# EAGLE board Schemat termometru sWERSJA KOLEJNAAAAA DOSKONALA 3 (EAGLE 9.4.1)
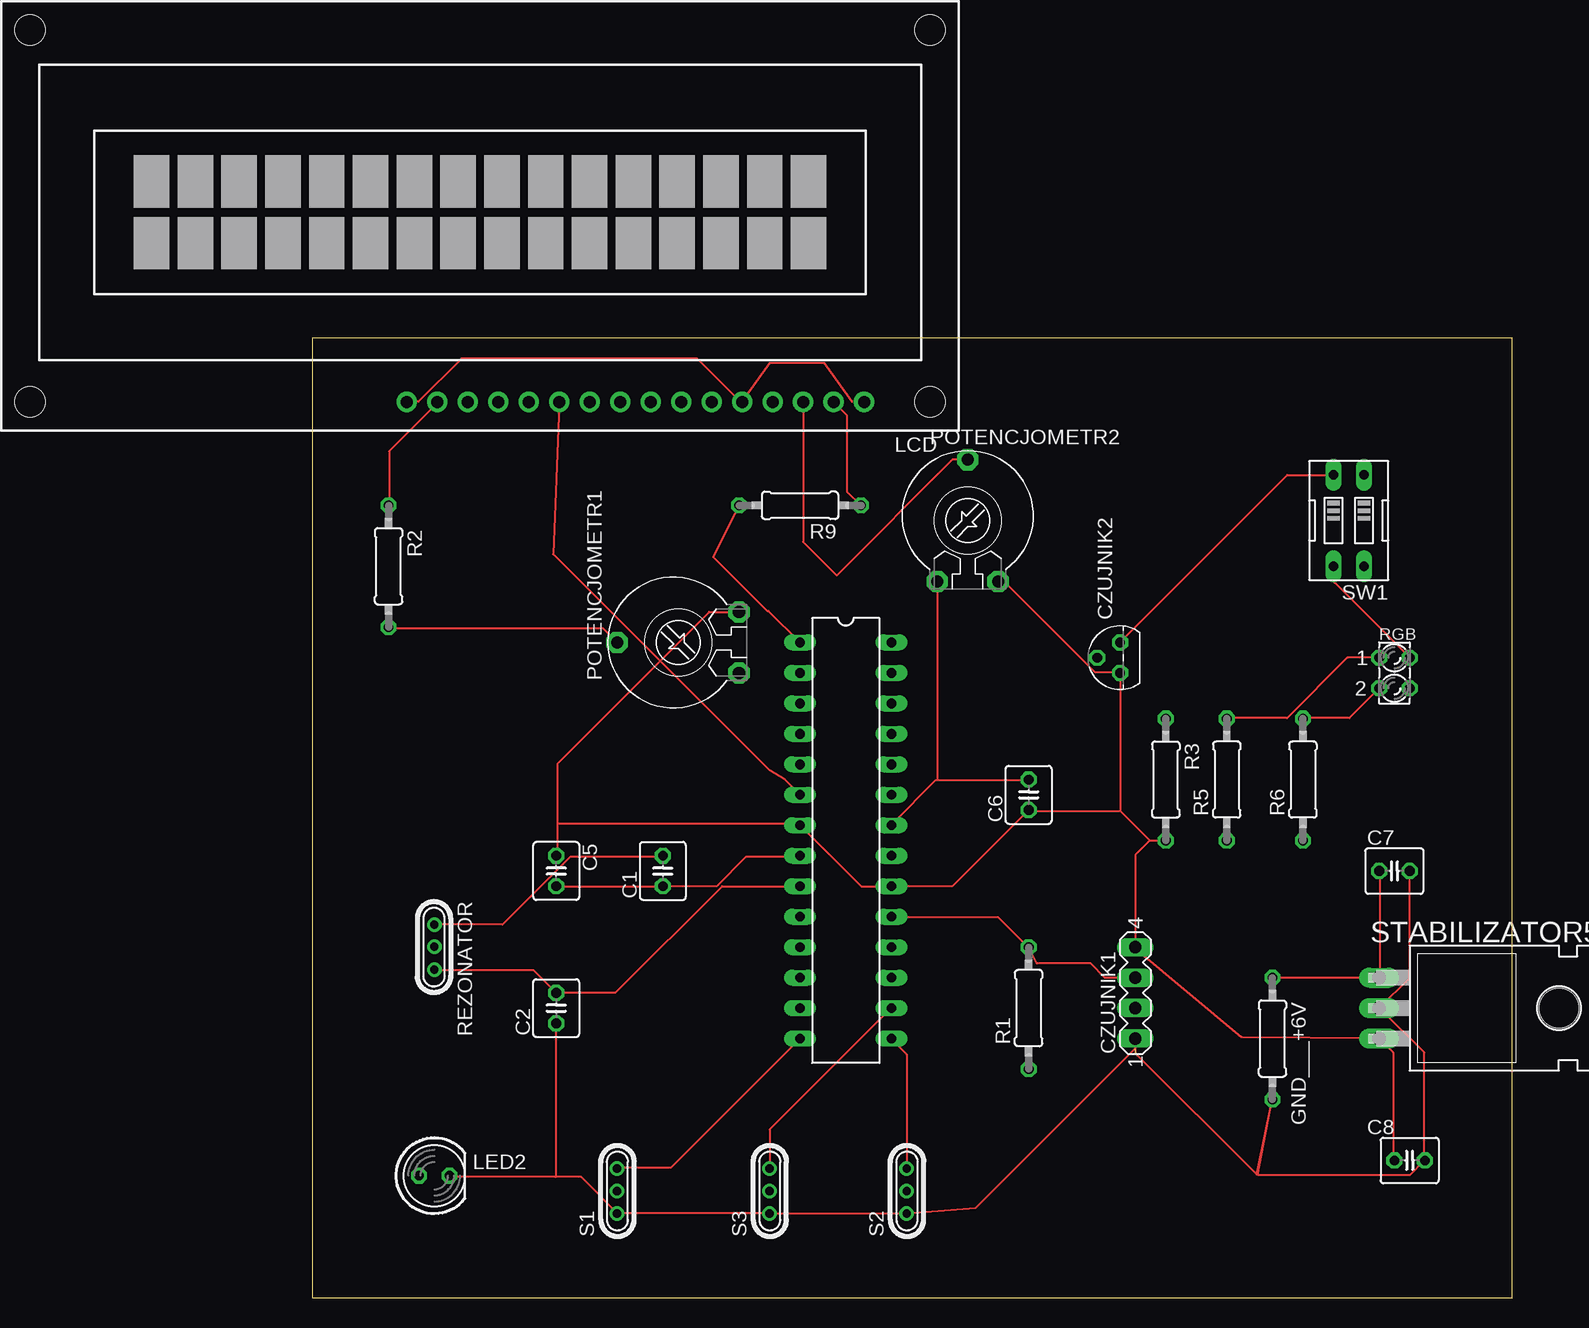
[diagram p0: board, top side]
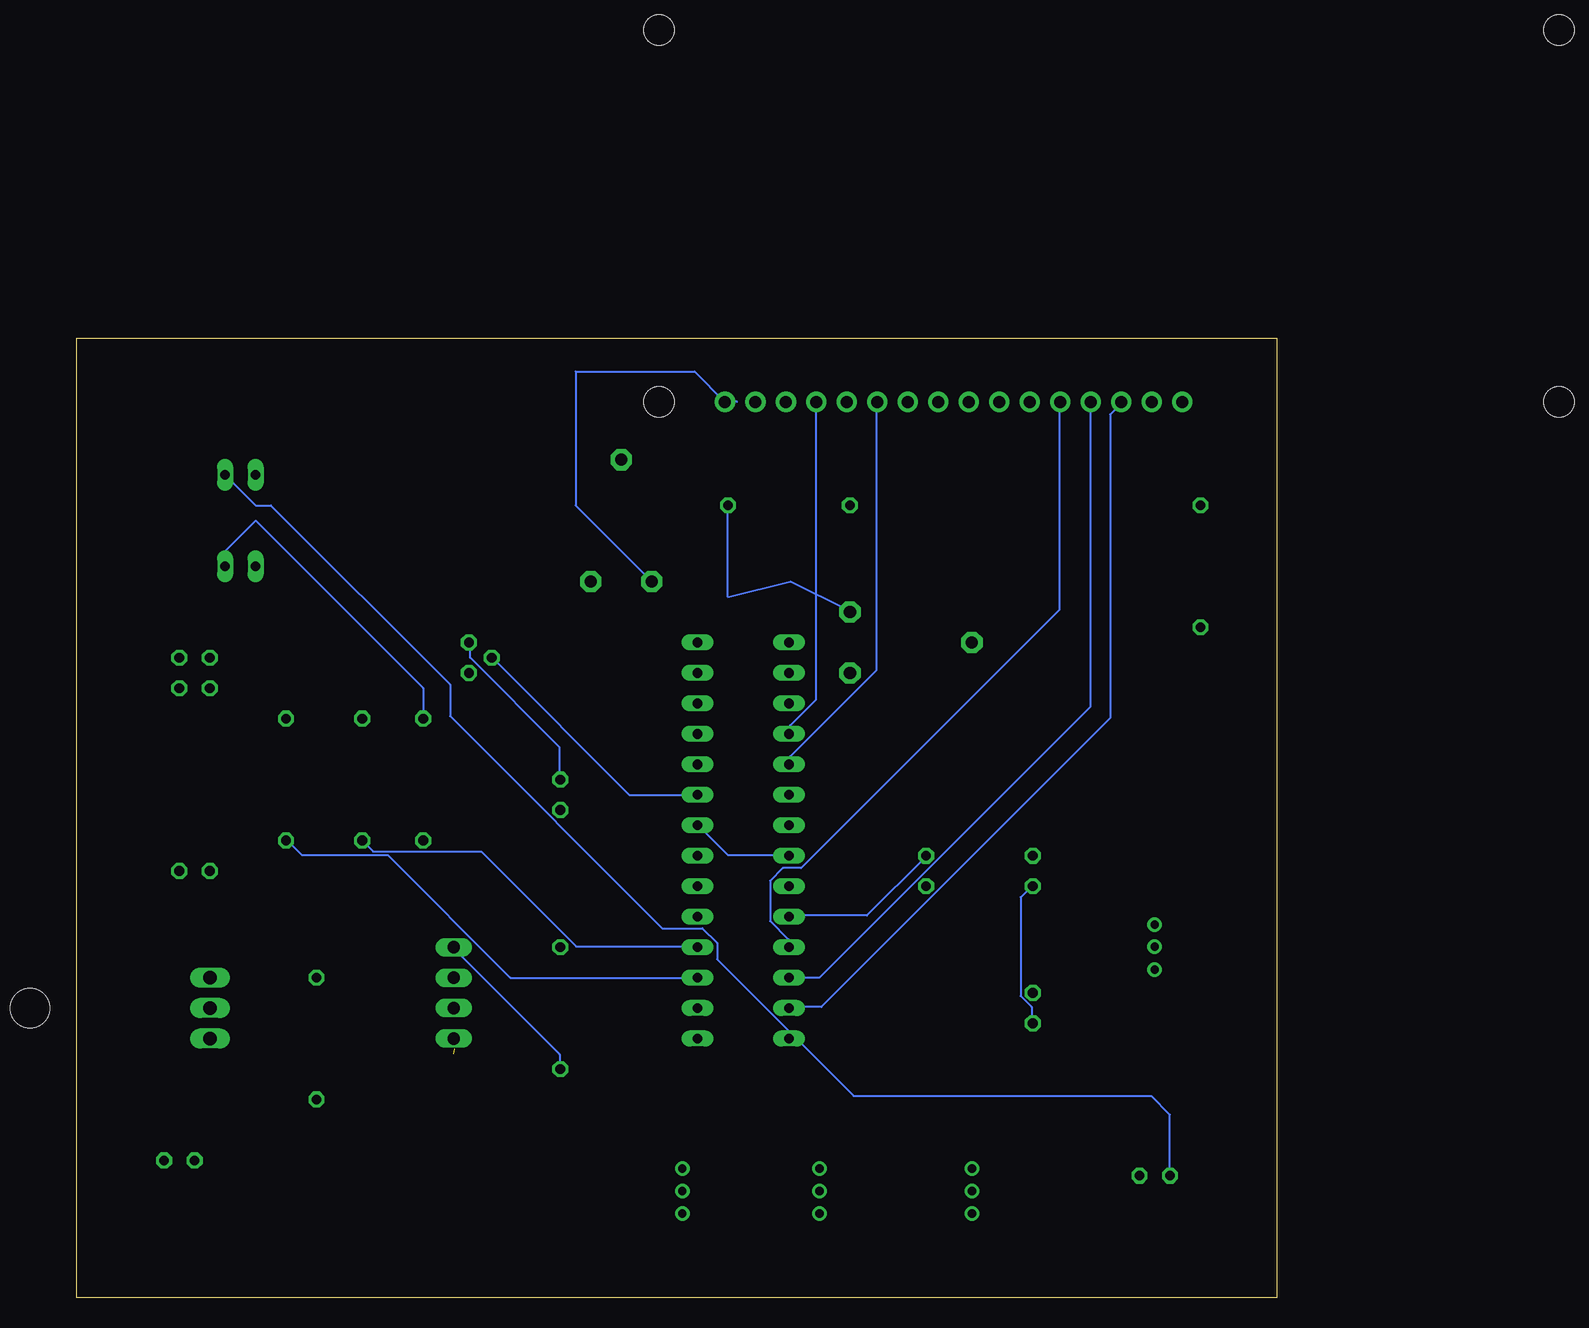
[diagram p1: board, bottom side, seen from below]

Size 100 x 80 mm. Coordinates in mm from the lower left corner, seen from the top.
Outline: 0,0 100,0 100,80 0,80 0,0
Copper layers (1*16): Top 0.035mm / dielectric 1.5mm / Bottom 0.035mm
Design rules "default": minimum track width 6mil, minimum drill 0.35mm, track to track 6mil, track to pad 6mil, pad to pad 6mil, via to via 6mil, smd to smd 6mil, copper to edge 40mil, drill to drill 6mil, minimum pad ring 10mil, minimum via ring 8mil, stop-mask expansion 4mil, vias tented up to drill 0mil, thermal gap 10mil

## Footprints (pad centres in the part's own frame; a part is rotated, then mirrored left to right if it is on the bottom)
C025-040X050 = drill 0.813 octagon: 1 -1.27,0; 2 1.27,0
MA04-1 = drill 1.016 long: 1 -3.81,0; 2 -1.27,0; 3 1.27,0; 4 3.81,0
TO92 = drill 0.813 octagon: 1 1.27,0; 2 0,1.905; 3 -1.27,0
0207/10 = drill 0.813 octagon: 1 -5.08,0; 2 5.08,0
DIL28-3 = drill 0.813 long: 1 -16.51,-3.81; 2 -13.97,-3.81; 3 -11.43,-3.81; 4 -8.89,-3.81; 5 -6.35,-3.81; 6 -3.81,-3.81; 7 -1.27,-3.81; 8 1.27,-3.81; 9 3.81,-3.81; 10 6.35,-3.81; 11 8.89,-3.81; 12 11.43,-3.81; 13 13.97,-3.81; 14 16.51,-3.81; 15 16.51,3.81; 16 13.97,3.81; 17 11.43,3.81; 18 8.89,3.81; 19 6.35,3.81; 20 3.81,3.81; 21 1.27,3.81; 22 -1.27,3.81; 23 -3.81,3.81; 24 -6.35,3.81; 25 -8.89,3.81; 26 -11.43,3.81; 27 -13.97,3.81; 28 -16.51,3.81
TUXGR_16X2_R2 = drill 1 pad 1.676: 1 -32,15.5; 2 -29.46,15.5; 3 -26.92,15.5; 4 -24.38,15.5; 5 -21.84,15.5; 6 -19.3,15.5; 7 -16.76,15.5; 8 -14.22,15.5; 9 -11.68,15.5; 10 -9.14,15.5; 11 -6.6,15.5; 12 -4.06,15.5; 13 -1.52,15.5; 14 1.02,15.5; 15 3.56,15.5; 16 6.1,15.5 | hole 2.5: -37.5,-15.5; 37.5,-15.5; -37.5,15.5; 37.5,15.5
LED5MM = drill 0.813 octagon: A -1.27,0; K 1.27,0
PT-10 = drill 1.016 pad 1.778 octagon: 1 -2.54,-5.08; 2 2.54,-5.08; 3 0,5.08
UM1 = drill 0.7 pad 1.2: 1 -1.875,0; 2 -0.027,0; 3 1.875,0
LZR182 = drill 0.813 octagon: A1 -1.27,1.27; A2 -1.27,-1.27; K1 1.27,1.27; K2 1.27,-1.27
TO220H = drill 1.118 long: 1 -2.54,-10.16; 2 0,-10.16; 3 2.54,-10.16 | hole 3.302: 0,4.826
EDG-02 = drill 0.813 long: 1 -1.27,-3.81; 2 1.27,-3.81; 3 1.27,3.81; 4 -1.27,3.81

## Placement (x,y rotation side)
C1  [C025-040X050]  29.21,35.56 90 top
C2  [C025-040X050]  20.32,24.13 90 top
C5  [C025-040X050]  20.32,35.56 270 top
C6  [C025-040X050]  59.69,41.91 90 top
C7  [C025-040X050]  90.17,35.56 0 top
C8  [C025-040X050]  91.44,11.43 0 top
CZUJNIK1  [MA04-1]  68.58,25.4 90 top
CZUJNIK2  BC238  [TO92]  67.31,53.34 90 top
GND___+6V  [0207/10]  80.01,21.59 270 top
IC1  MEGA8-P  [DIL28-3]  44.45,38.1 270 top
LCD  TUXGR_16X2_R2  [TUXGR_16X2_R2]  13.97,90.17 180 top
LED2  [LED5MM]  10.16,10.16 0 top
POTENCJOMETR1  [PT-10]  30.48,54.61 90 top
POTENCJOMETR2  [PT-10]  54.61,64.77 0 top
R1  [0207/10]  59.69,24.13 90 top
R2  [0207/10]  6.35,60.96 270 top
R3  [0207/10]  71.12,43.18 270 top
R5  [0207/10]  76.2,43.18 90 top
R6  [0207/10]  82.55,43.18 90 top
R9  [0207/10]  40.64,66.04 180 top
REZONATOR  16M20AUM1  [UM1]  10.16,29.21 270 top
RGB  LZR182  [LZR182]  90.17,52.07 0 top
S1  16M20AUM1  [UM1]  25.4,8.89 90 top
S2  16M20AUM1  [UM1]  49.53,8.89 90 top
S3  16M20AUM1  [UM1]  38.1,8.89 90 top
STABILIZATOR5V  7805T  [TO220H]  99.06,24.13 270 top
SW1  [EDG-02]  86.36,64.77 180 top

## Library data of the parts
C1 C2 C5-C8 = rcl; SPICEPREFIX: C
CZUJNIK1 = con-lstb; OC_FARNELL: unknown; OC_NEWARK: unknown
CZUJNIK2 = transistor-neu-to92
GND___+6V R1-R3 R5 R6 R9 = rcl; SPICEPREFIX: R
IC1 = atmel; OC_FARNELL: unknown; OC_NEWARK: unknown
LCD = display-lcd; OC_FARNELL: unknown; OC_NEWARK: unknown
LED2 RGB = led
POTENCJOMETR1 POTENCJOMETR2 = rcl; SPICEMODEL: POT; SPICEPREFIX: X
REZONATOR S1-S3 = crystal; OC_FARNELL: unknown; OC_NEWARK: unknown
STABILIZATOR5V = linear
SW1 = special

## Nets
DIPSWITCH: RGB.K1 RGB.K2 SW1.3
N$1: R3.1 SW1.4
N$2: IC1.18 R5.1
N$3: R5.2 RGB.A1
N$4: CZUJNIK2.2 IC1.23
N$5: CZUJNIK1.3 IC1.19 R1.2
N$6: IC1.16 S3.3
N$7: IC1.15 S2.3
N$8: IC1.14 S1.3
N$9: POTENCJOMETR1.3 R2.2
N$10: LED2.A SW1.1
N$11: LCD.15 R2.1
N$12: IC1.17 R6.1
N$13: LCD.3 POTENCJOMETR2.3
N$14: R6.2 RGB.A2
N$15: C2.2 IC1.9 REZONATOR.3
N$16: IC1.4 LCD.4
N$17: C1.2 IC1.10 REZONATOR.1
N$18: C5.1 C6.1 C8.1 CZUJNIK1.4 CZUJNIK2.3 IC1.7 IC1.20 LCD.2 POTENCJOMETR1.2 POTENCJOMETR2.2 R1.1 R3.2 R9.1 STABILIZATOR5V.3
N$19: C1.1 C2.1 C5.2 C6.2 C7.2 C8.2 CZUJNIK1.1 CZUJNIK2.1 GND___+6V.2 IC1.8 IC1.22 LCD.1 LCD.5 LCD.16 LED2.K POTENCJOMETR2.1 S1.1 S2.1 S3.1 STABILIZATOR5V.2 SW1.2
N$20: IC1.1 R9.2
N$21: IC1.5 LCD.6
N$22: IC1.13 LCD.14
N$23: IC1.12 LCD.13
N$24: IC1.11 LCD.12
N$25: IC1.6 LCD.11
N$26: C7.1 GND___+6V.1 STABILIZATOR5V.1

## Tracks (layer width: path | path; a pad name or v marks a point on that pad's centre or on a via)
DIPSWITCH
  Top 0.152: SW1.3 85.19,60.96 85.19,59.59 RGB.K1 RGB.K2
N$1
  Bottom 0.152: SW1.4 87.63,62.23 85.09,64.77 71.12,50.8 R3.1
N$2
  Bottom 0.152: R5.1 75.29,37.19 66.29,37.19 58.37,29.26 48.31,29.26 IC1.18
N$3
  Top 0.152: RGB.A1 86.26,53.34 81.23,48.31 76.2,48.31 R5.2
N$4
  Bottom 0.152: IC1.23 53.95,41.91 65.38,53.34 CZUJNIK2.2
N$5
  Top 0.152: CZUJNIK1.3 66.04,26.67 64.87,27.84 60.38,27.84 R1.2 59.59,29.26 57.15,31.7 48.31,31.7 IC1.19
N$6
  Top 0.152: S3.3 38.1,14.02 48.16,24.08 IC1.16
N$7
  Top 0.152: S2.3 49.53,20.27 48.31,21.49 IC1.15
N$8
  Top 0.152: IC1.14 29.87,10.82 25.45,10.82 S1.3
N$9
  Top 0.152: POTENCJOMETR1.3 24.23,55.78 6.4,55.78 R2.2
N$10
  Bottom 0.152: LED2.A 8.89,15.24 10.46,16.82 35.26,16.82 46.63,28.19 46.63,29.57 47.85,30.79 51.21,30.79 68.89,48.46 68.89,51.1 83.82,66.04 85.09,66.04 SW1.1
N$11
  Top 0.152: R2.1 6.4,66.14 6.4,70.56 10.36,74.52 LCD.15
N$12
  Bottom 0.152: IC1.17 63.86,26.67 74.07,36.88 81.23,36.88 82.45,38.1 R6.1
N$13
  Top 0.152: LCD.3 40.89,63 43.69,60.2 53.34,69.85 POTENCJOMETR2.3
N$14
  Top 0.152: RGB.A2 86.41,48.31 82.6,48.31 R6.2
N$15
  Top 0.152: REZONATOR.3 10.21,27.28 18.44,27.28 C2.2 20.42,25.45 25.3,25.45 34.14,34.29 IC1.9
N$16
  Bottom 0.152: IC1.4 40.54,47.09 40.54,47.7 38.41,49.84 38.41,74.52 LCD.4
N$17
  Top 0.152: REZONATOR.1 10.21,31.09 15.85,31.09 21.49,36.73 29.11,36.73 C1.2
  Bottom 0.152: IC1.10 40.54,31.85 34.14,31.85 29.26,36.73 C1.2
N$18
  Top 0.152: 20.42,39.47 20.42,44.5 33.07,57.15 POTENCJOMETR1.2 35.56,57.25 | 20.42,39.47 20.42,36.88 C5.1 | LCD.2 44.55,73.55 44.55,67.21 R9.1 | STABILIZATOR5V.3 90.07,20.42 90.07,11.43 C8.1 | 88.85,21.64 77.42,21.74 68.58,29.11 | 67.36,40.54 59.74,40.54 C6.1 53.34,34.29 IC1.20 45.72,34.29 IC1.7 40.54,39.47 20.42,39.47 | 69.8,38.1 67.36,40.54 | 67.36,40.54 67.36,51.97 CZUJNIK2.3 67.21,52.12 65.23,52.12 57.76,59.59 57.15,59.59 POTENCJOMETR2.2 | CZUJNIK1.4 68.58,36.88 69.8,38.1 | 69.8,38.1 R3.2
  Bottom 0.152: R9.1 45.72,58.42 40.53,59.68 35.56,57.25 | R1.1 59.74,19.05 59.74,20.27 68.58,29.11 CZUJNIK1.4 | 88.85,21.64 STABILIZATOR5V.3
N$19  (1 unrouted)
  Top 0.152: C7.2 91.44,26.67 STABILIZATOR5V.2 89,24.08 92.66,20.42 92.66,11.43 | 92.66,11.43 91.44,10.21 78.79,10.21 GND___+6V.2 78.69,10.26 68.63,20.32 CZUJNIK1.1 | 92.66,11.43 C8.2 | S3.1 25.45,7.01 S1.1 25.3,7.16 22.4,10.06 20.27,10.06 | S3.1 S2.1 55.27,7.47 68.53,20.73 | S3.1 | 20.27,10.06 11.43,10.06 LED2.K | LCD.16 7.92,74.68 8.84,74.68 12.45,78.28 32.05,78.28 35.66,74.68 LCD.5 | 44.96,74.68 42.62,77.93 38.15,77.93 LCD.5 | C5.2 C1.1 33.68,34.29 36.12,36.73 40.54,36.73 IC1.8 | 52.12,43.13 51.97,43.13 48.31,39.47 IC1.22 | 52.12,43.13 59.59,43.13 C6.2 | SW1.2 81.23,68.58 67.36,54.71 CZUJNIK2.1 | 52.12,43.13 52.12,59.59 POTENCJOMETR2.1 | 20.27,10.06 20.27,22.86 C2.1
  Bottom 0.152: 44.96,74.68 45.87,74.68 LCD.1 48.51,77.21 58.42,77.21 58.42,66.04 POTENCJOMETR2.1 | LCD.5 | C2.1 20.42,22.86 20.42,24.23 21.34,25.15 21.34,33.38 20.42,34.29 C5.2 | IC1.8 40.69,36.88 45.72,36.88 48.16,39.32 IC1.22 | CZUJNIK2.1 67.21,54.56 67.21,53.34 59.74,45.87 59.74,43.28 C6.2
N$20
  Top 0.152: IC1.1 38,57.25 37.9,57.25 33.42,61.73 R9.2
N$21
  Bottom 0.152: IC1.5 40.54,44.5 40.54,45.11 33.38,52.27 33.38,74.52 LCD.6
N$22
  Bottom 0.152: IC1.13 40.54,24.23 37.95,24.23 13.87,48.31 13.87,73.61 12.95,74.52 LCD.14
N$23
  Bottom 0.152: IC1.12 38.1,26.67 15.54,49.23 15.54,74.52 LCD.13
N$24
  Bottom 0.152: IC1.11 40.69,29.26 40.69,29.87 42.22,31.39 42.22,34.75 41.15,35.81 39.62,35.81 18.14,57.3 18.14,74.52 LCD.12
N$25
  Top 0.152: IC1.6 39.37,43.18 38.1,43.94 20.07,61.98 20.57,74.52
  Bottom 0.152: 20.57,74.52 LCD.11
N$26
  Top 0.152: GND___+6V.1 STABILIZATOR5V.1 89,26.67 89,35.51 C7.1